# Altium PCB PCB2_250.PcbDoc
Units mm, origin at the board's own origin, x right, y up, seen from the top; angles counter-clockwise.
Board outline 51 x 31 mm, 2 copper layers (Top Layer, Bottom Layer); 15 components, 12 nets, 38 pads, 0 vias.
Unrouted connection lines stored in the file: 1.
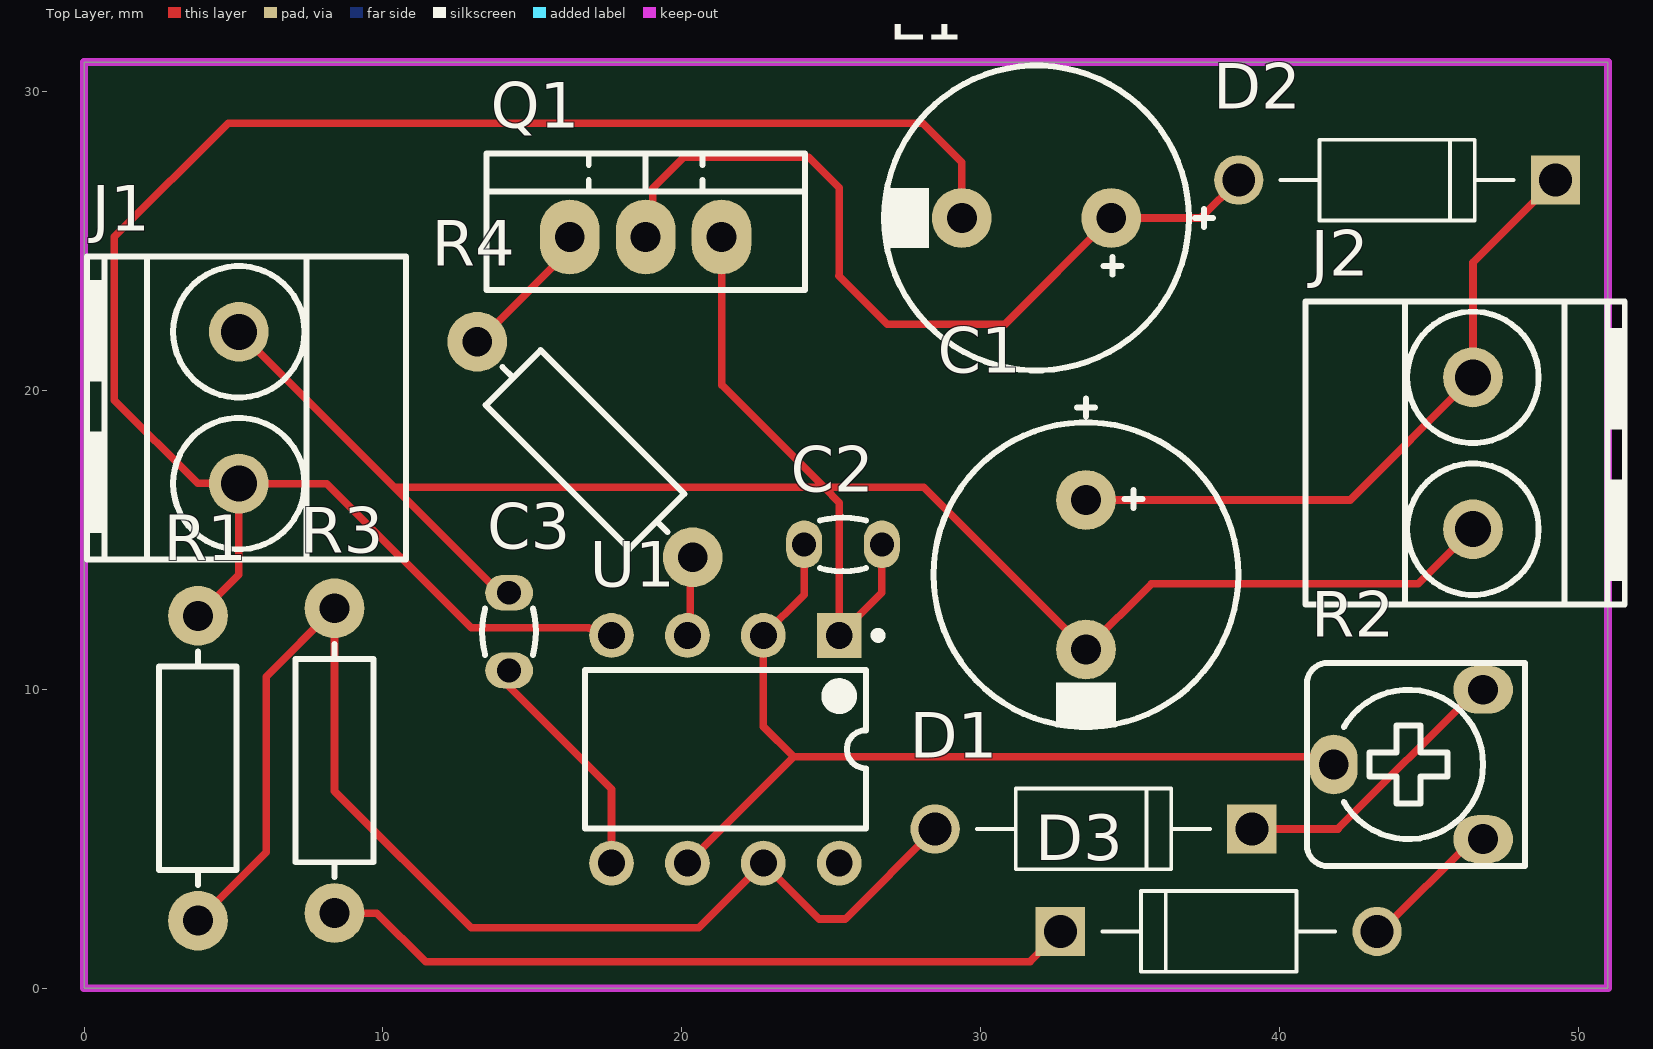
[diagram p0: Top Layer view]
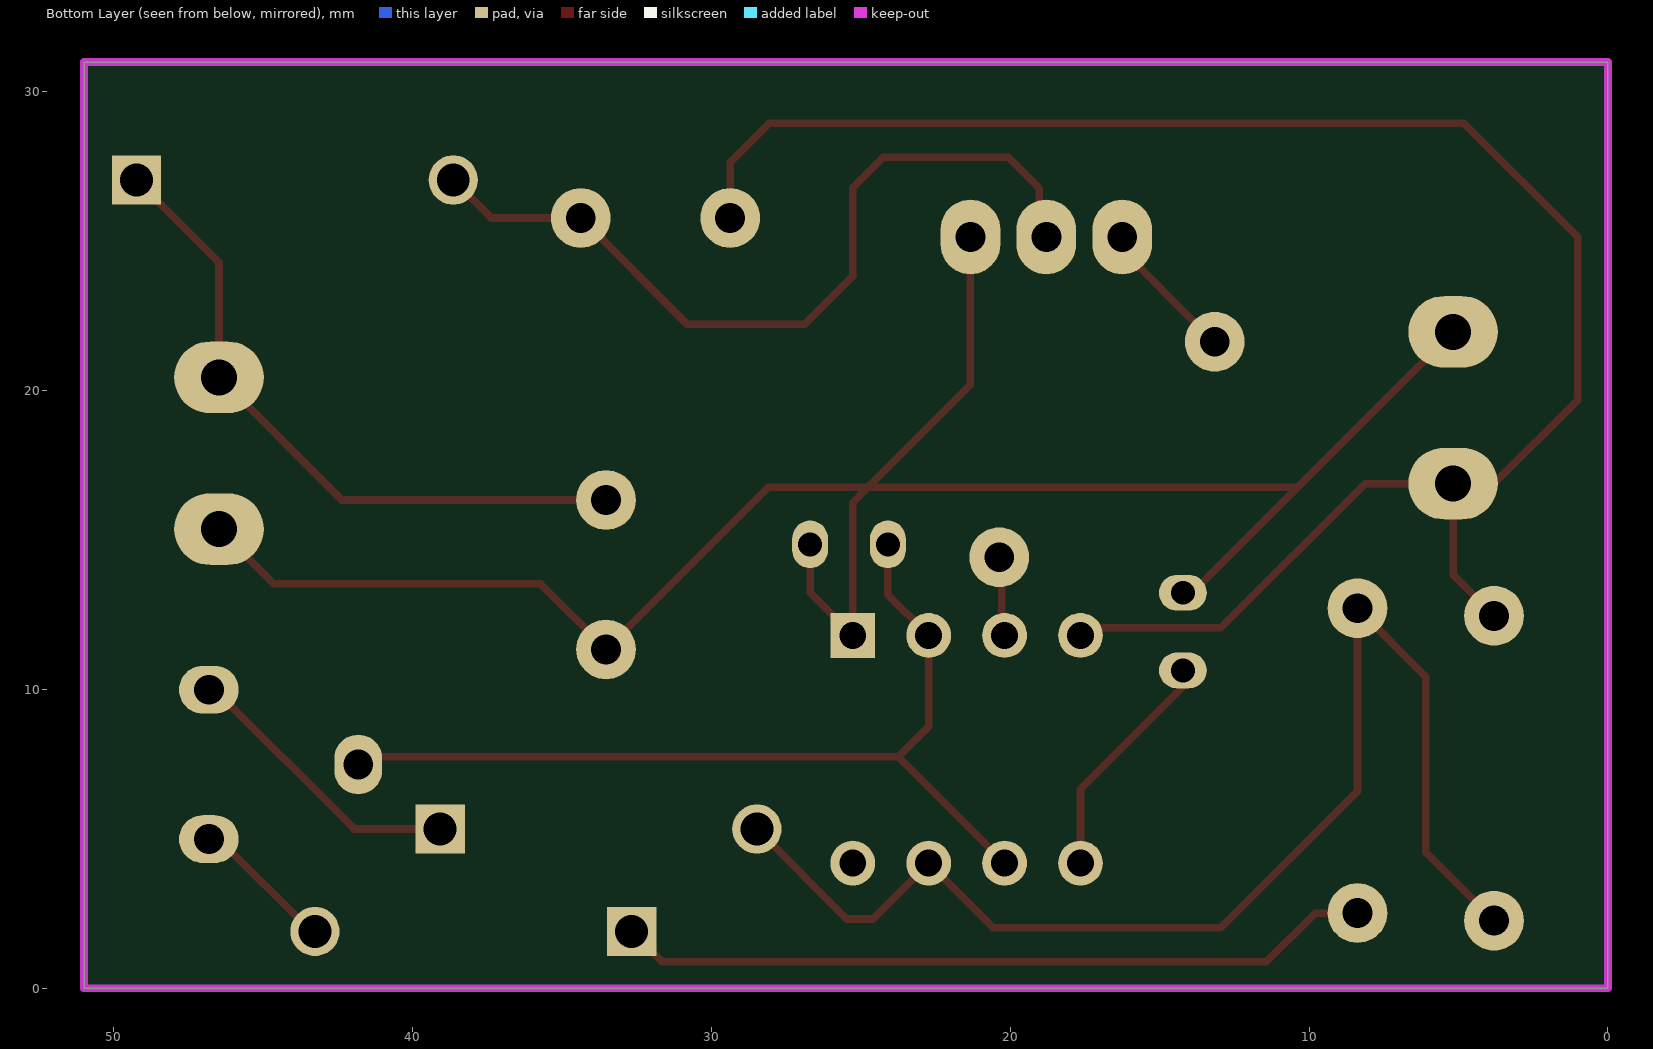
[diagram p1: Bottom Layer view, seen from below]
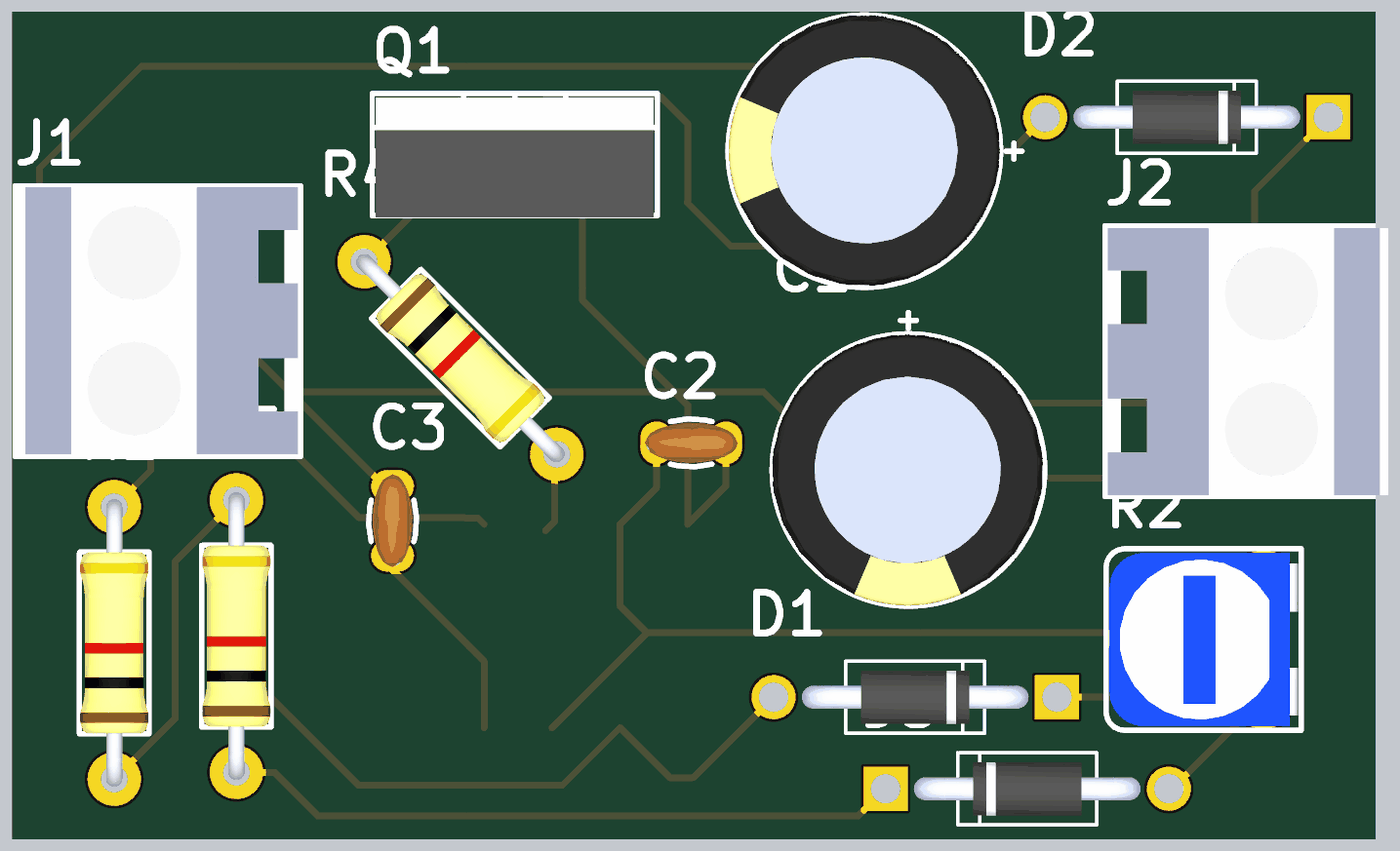
[diagram p2: 3D render of the assembled board from above, using the file's embedded part models]

## Layer stack, top to bottom
Top Solder: solder mask 0.0102, Solder Resist, Dk 3.5
Top Layer: signal copper 0.0356
Dielectric 1: dielectric 0.32, FR-4, Dk 4.8
Bottom Layer: signal copper 0.0356
Bottom Solder: solder mask 0.0102, Solder Resist, Dk 3.5

## Board outline
0,0 51,0 51,31 0,31

## Design rules (kind name [scope] priority, off if disabled: settings)
Clearance [All] p1: gap=0.254 ignorepadtopadclearanceinfootprint=FALSE except(0: Arc-Hole Track-Hole SMDPad-Hole THPad-Hole Via-Hole Fill-Hole Poly-Hole Region-Hole Text-Hole)
PolygonConnect [All] p1: connectstyle=Relief reliefconductorwidth=0.254 reliefentries=4 polygonreliefangle="90 Angle" airgapwidth=0.254
RoutingVias [All] p1: holewidth=0.711 width=1.27 viastyle="Through Hole" minholewidth=0.711 minwidth=1.27 maxholewidth=0.711 maxwidth=1.27
SolderMaskExpansion [All] p1: expansion=0.102 istentingtop=FALSE
Width [All] p1: maxlimit=0.254 minlimit=0.254 preferedwidth=0.254
30 further rules are at their usual default settings.

## Classes and differential pairs
component class Sheet1: C2 C3 D1 D2 D3 J1 J2 L1 Q1 R1 R2 R3 R4 U1

## Components (designator, comment, footprint, x,y, rotation, side; value= is the part's Value field where it differs from the comment)
C1 "100uF" C_EL_10X20 33.528,13.843 r270 top
C2 "1nF" C_CER_D3 25.4,14.859 r180 top
C3 "100nF" C_CER_D3 14.224,11.938 r270 top
D1 "1N4007" DIOAD1060W80L520D270 33.782,5.334 r180 top
D2 "1N4007" DIOAD1060W80L520D270 43.942,27.051 r180 top
D3 "1N4007" DIOAD1060W80L520D270 37.973,1.905 r0 top
J1 "con_x2" TBG_2 5.182,19.431 r90 top net-tie
J2 "con_x2" TBG_2 46.482,17.907 r270 top net-tie
L1 "2mH" C_EL_10X20 31.877,25.781 r180 top
Q1 "IRF640" TO220_3 18.796,25.146 r0 top
R1 "1K" R025W_AX04 3.81,7.366 r90 top
R2 "POT10K" POT_7X5 44.323,7.493 r90 top
R3 "1K" R025W_AX04 8.382,7.62 r90 top
R4 "220" R025W_AX04 16.764,18.034 r315 top
U1 "NE555" NE555 -1.397,53.213 r270 top

## Footprints (in the part's own frame and the unit in brackets; to place one, negate y for a bottom-side part, rotate by r counter-clockwise, add the part's x,y. Pads: shape width x height; smd on the part's side, far side on the other; paste and mask are expansions set on the pad)
C_CER_D3 [mm] "CAP, CER MULTILAYER, D:3.5mm, pitch: 2.54mm"
  oval 1.2x1.6 hole 0.8: 1(-1.3,0) 2(1.3,0)
  silkscreen extent -0.78,-0.9 0.78,0.9, body extent -1.75,-0.75 1.75,0.75, height 4
C_EL_10X20 [mm] "Cap Elec, D10.0X20.0H pitch: 5.0mm, RB.2/.4"
  round 2 hole 1: 1(-2.5,0) 2(2.5,0)
  silkscreen extent -5.9,-5.1 5.1,5.1, body extent -5.08,-5.1 5.08,5.04, height 20.62
DIOAD1060W80L520D270 [mm]
  round 1.65 hole 1.1: A(5.3,0)
  rect 1.65x1.65 / inner round 1.65 / far side rect 1.65x1.65 hole 1.1: C(-5.3,0)
  silkscreen extent -3.9,-1.35 3.9,1.35, body extent -4.24,-1 4.24,1, height 2
NE555 [mm]
  rect 1.5x1.5 hole 0.9: 1(41.402,26.67)
  round 1.5 hole 0.9: 2(41.402,24.13) 3(41.402,21.59) 4(41.402,19.05) 5(49.022,19.05) 6(49.022,21.59) 7(49.022,24.13) 8(49.022,26.67)
  silkscreen extent 41.28,18.16 47.86,28.1, body extent 41.28,18.16 49.15,27.56, height 4.36
POT_7X5 [mm] "POT, TRIM, 7.5X5.0mm, pitch: 5.0mm"
  oval 1.6x2 hole 1: 1(-2.5,-2.5) 3(2.5,-2.5)
  oval 2x1.6 hole 1: 2(0,2.5)
  silkscreen extent -3.4,-3.9 3.4,3.4, body extent -3.25,-3.78 3.25,3.27, height 7
R025W_AX04 [mm] "RESISTOR 1/4 WATT, AXIAL0.4"
  round 2 hole 1: 1(-5.1,0) 2(5.1,0)
  silkscreen extent -3.9,-1.3 3.9,1.3, body extent -5.38,-1.28 5.38,1.28, height 2.6
TBG_2 [mm] "Terminal Block Green"
  round 2 / inner round 2 / far side oval 2.4x3 hole 1.2: 1(-2.54,0) 2(2.54,0)
  silkscreen extent -5.08,-5.6 5.05,5.08, body extent -5,-5.5 5,5, height 14
TO220_3 [mm] "TO-220 3 LEAD, TO-262, pitch: 2.54mm  10x4.5mm"
  oval 2x2.5 hole 1: 1(-2.54,0) 2(0,0) 3(2.54,0)
  silkscreen extent -5.33,-1.78 5.33,2.79, body extent -5.2,-1.85 5.2,2.65, height 19

## Part data
C1: library part CAP_THD_EL_10X20, "CAP, THD, ELEC,", ASSEMBLY=ASSEMBLY, DESC=DESCRIPTION, DIST#=MOUSER, MANF=MANF, MANF_P#=MANF_PART#, PARAM=20%, PARAM2=25V, PRICE="10= 5$"
C2 C3: library part CAP_THD_CERML, "CAP, THD, CER MULTI LAYER,", ASSEMBLY=ASSEMBLY, DESC="CAP, CER MULTI LAYER,", MANF=MANF, MANF_P#=MANF_PART#, PARAM2=50V, PRICE="100= 1$"
D1 D2 D3: "Diode Standard 1000 V 1A Through Hole DO-41", Package="DO-41 NTE Electronics", Availability="In Stock", Check_prices=https://www.snapeda.com/parts/1N4007/NTE+Electronics/view-part/?ref=eda, MF="NTE Electronics, Inc.", MP=1N4007, PRICE=None, Purchase-URL=https://pricing.snapeda.com/search/part/1N4007/?ref=eda, SnapEDA_Link=https://www.snapeda.com/parts/1N4007/NTE+Electronics/view-part/?ref=snap
L1: library part IND_THD, "INDUCTOR, THD"
Q1: library part MOSN_IRF640_TO220, "MOSFET, N-CH, 0.15RDS, 18A, 300VDS, 2~4VGSth", ASSEMBLY=ASSEMBLY, MANF="VISHAY, ON", MANF_P#=IRF640, PARAM="0.15RDS, 18A, -55~175oC", PARAM2="200VDS, 2~4VGSth", PRICE="0.9$, 1500toman@PAYA"
R1 R3 R4: library part RES_THD, "RESISTOR, THD", ASSEMBLY=ASSEMBLY, DESC=DESCRIPTION, DIST#=MOUSER, MANF="KOA SPEER", MANF_P#=RK73H1ETTP4701F, PARAM=0.063W, PARAM2=1%, PRICE="100= 0.5$"
R2: library part RES_THD_POT_VOLUME, "RESISTOR, THD, Potentiometer Volume"

## Nets (pads, with @x,y where several pads share a name; then routed paths per layer and width w, separated by ;. In a path a pad name is that pad's centre, name@x,y a point inside that pad or via, vN(x,y) a via of type N, cw(c..) or ccw(c..) an arc to the next point about the centre after c; other vN are vias at no path point)
GND: C1.2 C2.1 C3.1 J1.2 J2.2 Q1.3 U1.1 | length 71.3
  Top Layer w0.254: J1.2 10.389,16.764 ; C3.1 13.915,13.238 10.389,16.764 ; Q1.3 21.336,20.193 24.765,16.764 ; C2.1 26.7,13.238 U1.1 25.273,16.256 24.765,16.764 ; J2.2 44.655,13.54 35.725,13.54 C1.2 28.107,16.764 24.765,16.764 ; 10.389,16.764 24.765,16.764
NetC3_2: C3.2 U1.5 | length 8
  Top Layer w0.254: C3.2@13.782,10.541 17.653,6.67 U1.5
NetD1_A: D1.A R1.1 R3.2 U1.7 | length 43.4
  Top Layer w0.254: R1.1 6.096,4.552 6.096,10.434 R3.2 8.382,6.604 12.954,2.032 20.574,2.032 U1.7 24.604,2.32 25.468,2.32 D1.A
NetD1_C: D1.C R2.3 | length 9.7
  Top Layer w0.254: D1.C 41.964,5.334 46.623,9.993 R2.3
NetD2_A: D2.A L1.1 Q1.2 | length 27.8
  Top Layer w0.254: Q1.2 19.03,25.38 19.03,26.777 20.066,27.813 24.257,27.813 25.273,26.797 25.273,23.876 25.251,23.854 26.88,22.225 30.821,22.225 L1.1 37.372,25.781 D2.A
NetD3_A: D3.A R2.1 | length 4.8
  Top Layer w0.254: D3.A 43.404,1.905 46.492,4.993 R2.1
NetD3_C: D3.C R3.1 | length 25.4
  Top Layer w0.254: R3.1 9.799,2.52 11.43,0.889 31.657,0.889 D3.C
NetQ1_1: Q1.1 R4.1 | length 4.4
  Top Layer w0.254: R4.1@13.589,21.864 13.589,22.046 16.256,24.713 Q1.1
puls_mosfet: R4.2 U1.3 | length 3
  Top Layer w0.254: U1.3@19.955,11.573 U1.3 20.282,11.9 20.282,14.339 R4.2
THR: C2.2 R2.2 U1.2 U1.6 | length 31.5
  Top Layer w0.254: U1.6 23.749,7.747 ; C2.2 24.1,13.178 U1.2 22.733,8.763 23.749,7.747 ; R2.2@41.823,7.293 R2.2 ; R2.2@41.951,7.747 23.749,7.747
VCC_in: J1.1 L1.2 R1.2 U1.4 U1.8 | length 62.7
  Top Layer w0.254: R1.2 5.182,13.838 J1.1 ; U1.4 17.415,12.049 16.897,12.049 16.881,12.065 12.954,12.065 8.128,16.891 J1.1 ; L1.2 29.377,27.646 28.067,28.956 4.826,28.956 1.016,25.146 1.016,19.685 3.801,16.9 5.172,16.9 J1.1
Vo: C1.1 D2.C J2.1 | length 22.4
  Top Layer w0.254: C1.1 42.378,16.343 J2.1 46.482,24.291 D2.C

## Keep-outs
Keep-Out Layer:
  lines w0.254: 127.635,85.979 128.524,86.868 ; 0,0 51,0 51,31 0,31 0,0